# Altium PCB LVPowerModule.PcbDoc (part 1 of 2)
Units mm, origin at the board's own origin, x right, y up, seen from the top; angles counter-clockwise.
Board outline 100 x 60 mm, 2 copper layers (Top Layer, Bottom Layer); 81 components, 60 nets, 339 pads, 557 vias.
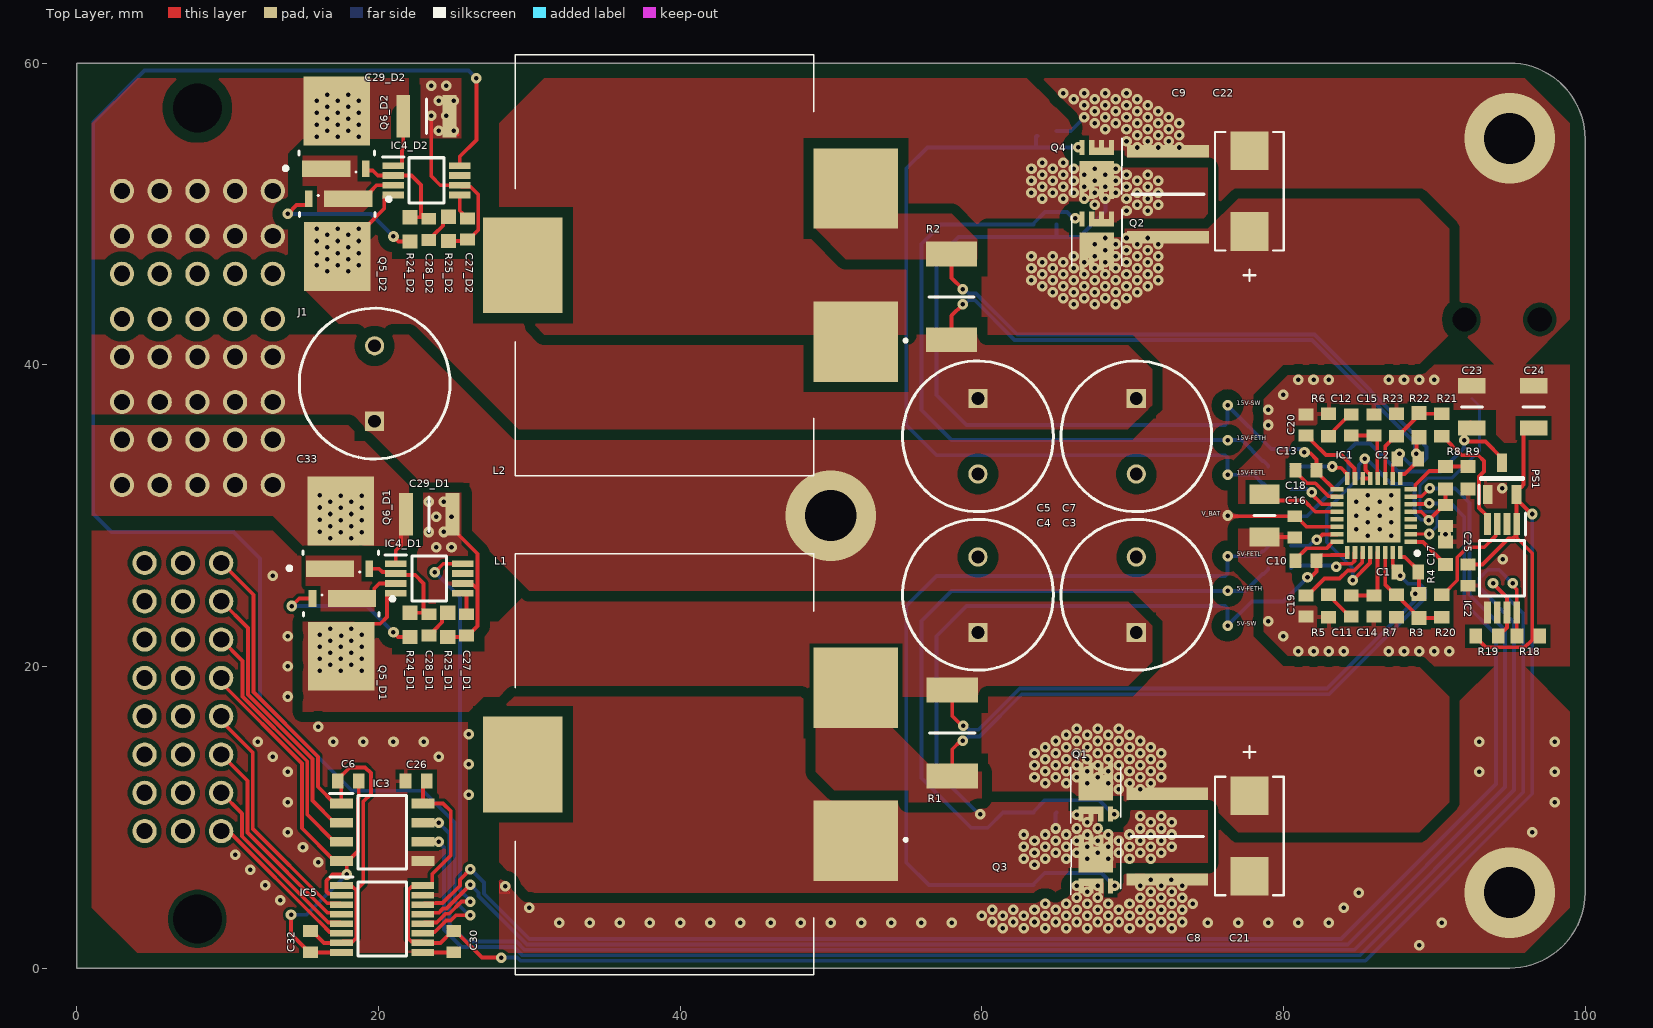
[diagram p0: Top Layer view]
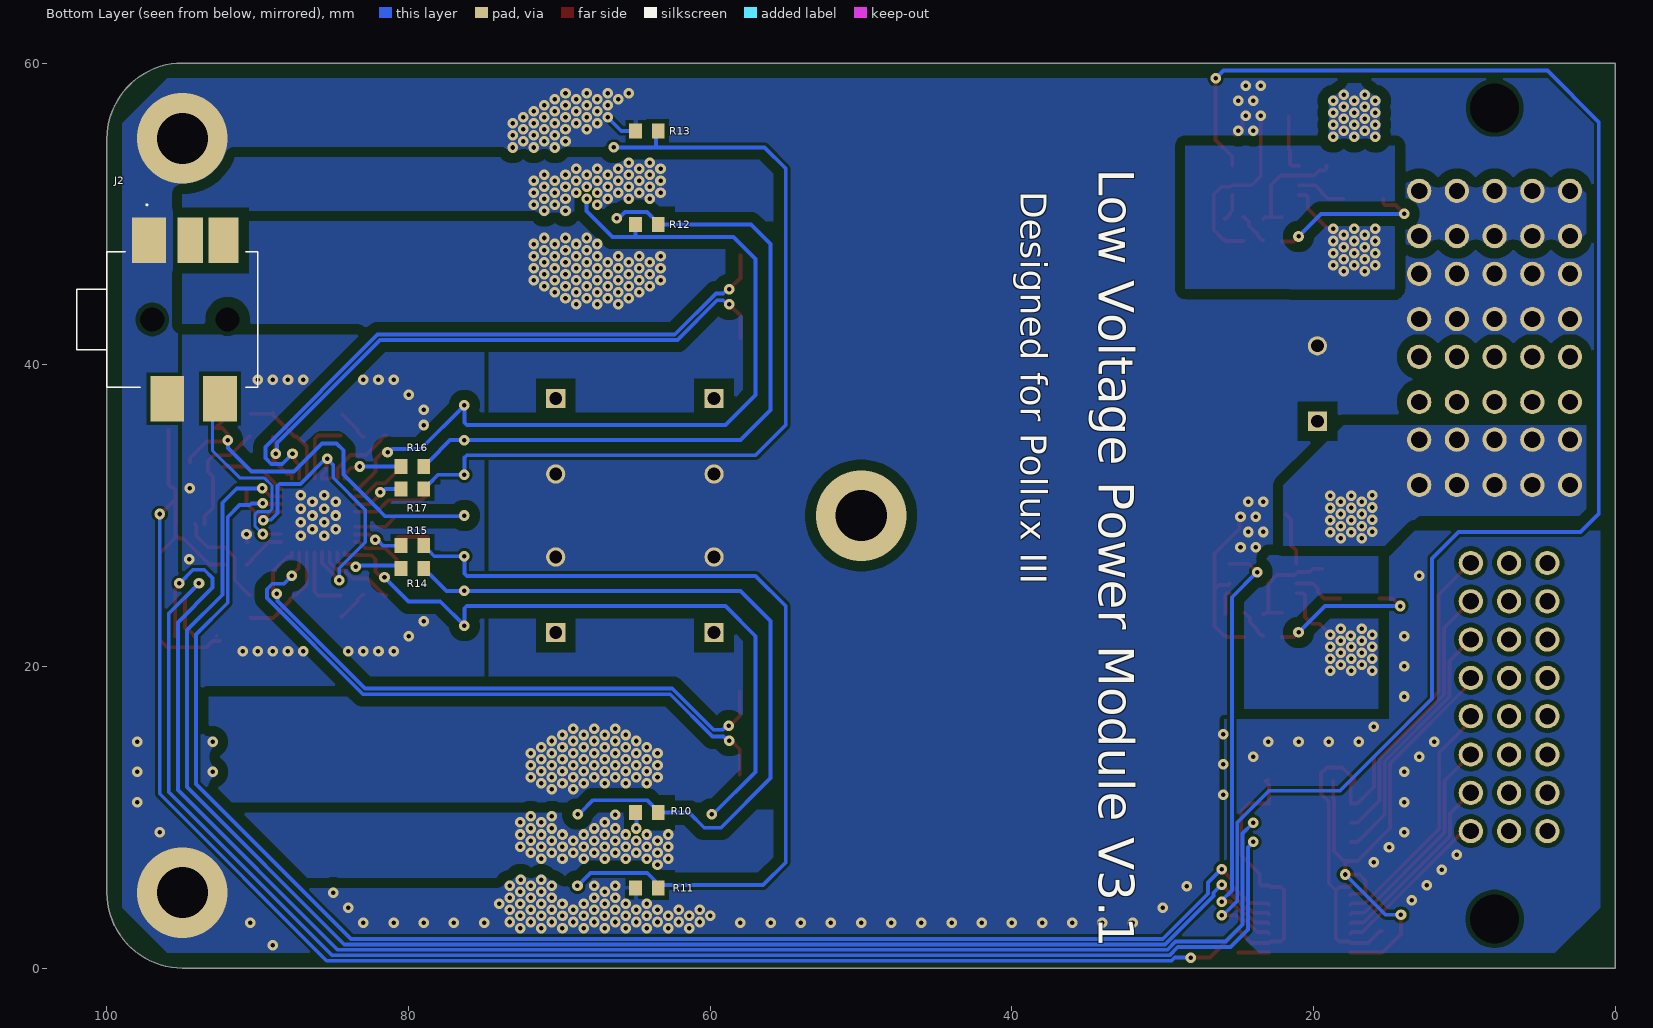
[diagram p1: Bottom Layer view, seen from below]
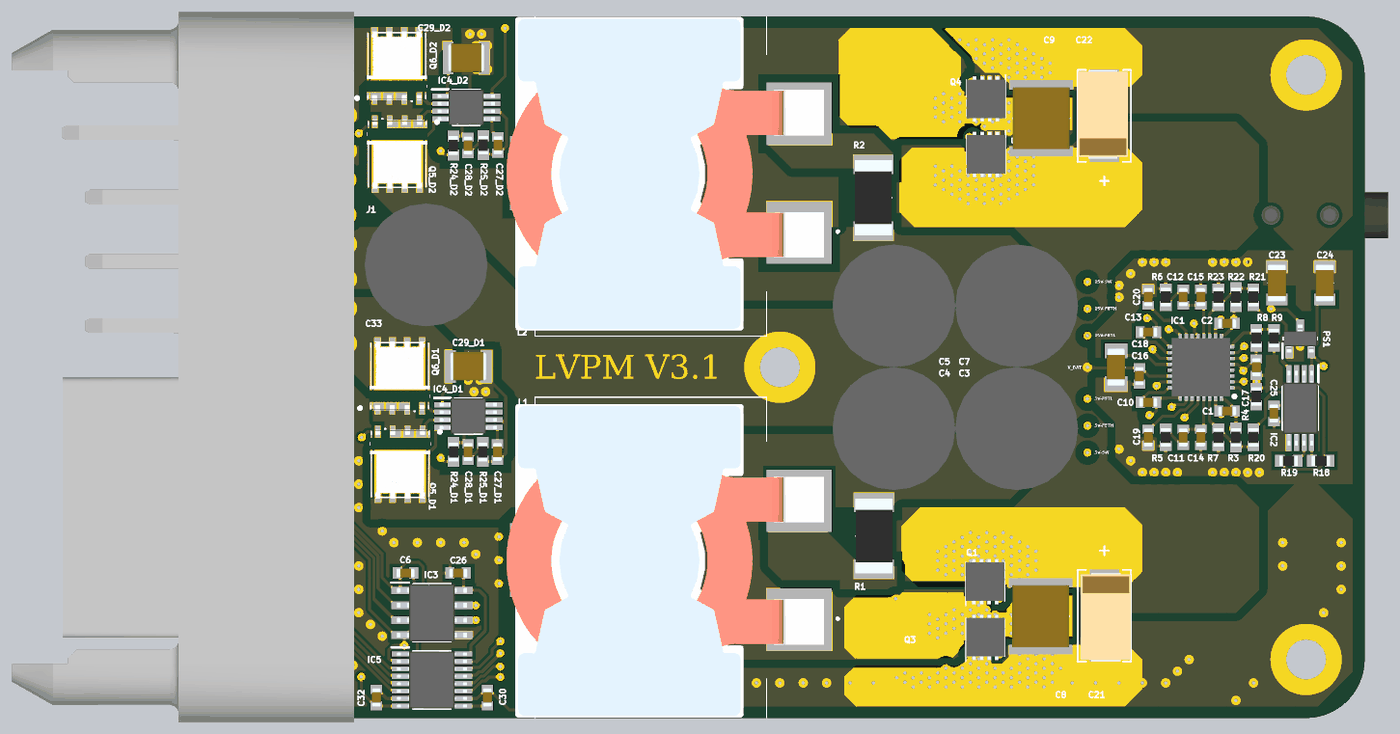
[diagram p3: 3D render of the assembled board from above, using the file's embedded part models]
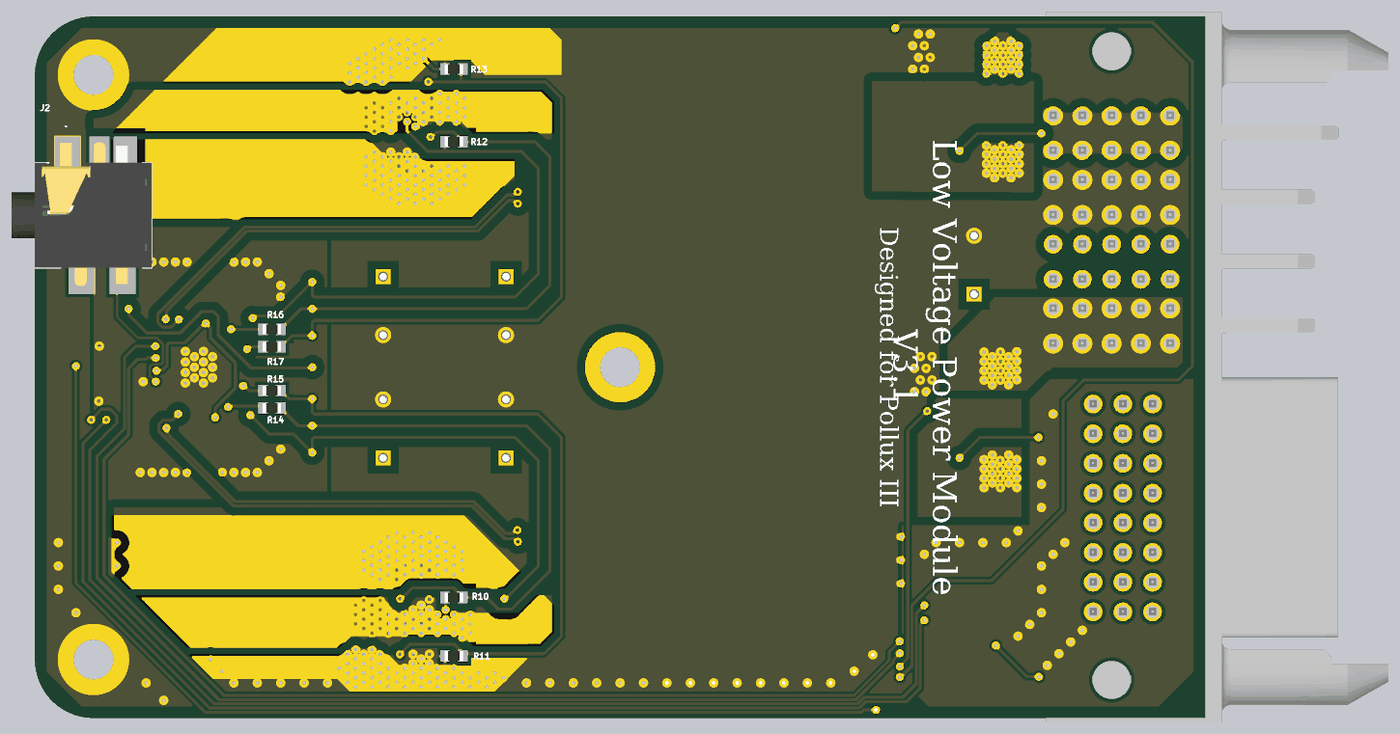
[diagram p4: 3D render of the assembled board from below, using the file's embedded part models]

## Layer stack, top to bottom
Top Solder: solder mask 0.0102, Solder Resist, Dk 3.5
Top Layer: signal copper 0.07
Dielectric 1: dielectric 0.32, FR-4, Dk 4.8
Bottom Layer: signal copper 0.07
Bottom Solder: solder mask 0.0102, Solder Resist, Dk 3.5

## Board outline
0,0 0,60 94.987,60 cw(c94.987,54.987) 100,54.987 100,5 cw(c95,5) 95,0

## Design rules (kind name [scope] priority, off if disabled: settings)
Clearance "High voltage Clearance 2" [InNetClass('HV2') vs Not InNetClass('HV1')] p1: gap=0.7 ignorepadtopadclearanceinfootprint=TRUE except(0.1: Arc-Text Track-Text SMDPad-Text THPad-Text Via-Text Fill-Text Poly-Text Region-Text Text-Text Text-Hole; 0.2: Arc-Arc Arc-Track Arc-SMDPad Track-Track Track-SMDPad; 0.3: Arc-THPad Arc-Via Arc-Hole Track-THPad Track-Via Track-Hole SMDPad-SMDPad SMDPad-THPad SMDPad-Via SMDPad-Hole THPad-Hole Via-Hole; 0.4: THPad-THPad THPad-Via Via-Via)
Clearance "High voltage Clearance 3" [InNetClass('HV3') vs Not InNetClass('HV4')] p2: gap=0.7 ignorepadtopadclearanceinfootprint=TRUE except(0.1: Arc-Text Track-Text SMDPad-Text THPad-Text Via-Text Fill-Text Poly-Text Region-Text Text-Text Text-Hole; 0.2: Arc-Arc Arc-Track Arc-SMDPad Track-Track Track-SMDPad; 0.3: Arc-THPad Arc-Via Arc-Hole Track-THPad Track-Via Track-Hole SMDPad-SMDPad SMDPad-THPad SMDPad-Via SMDPad-Hole THPad-Hole Via-Hole; 0.4: THPad-THPad THPad-Via Via-Via)
Clearance "High voltage Clearance 4" [InNetClass('HV4') vs Not InNetClass('HV3')] p3: gap=0.7 ignorepadtopadclearanceinfootprint=TRUE except(0.1: Arc-Text Track-Text SMDPad-Text THPad-Text Via-Text Fill-Text Poly-Text Region-Text Text-Text Text-Hole; 0.2: Arc-Arc Arc-Track Arc-SMDPad Track-Track Track-SMDPad; 0.3: Arc-THPad Arc-Via Arc-Hole Track-THPad Track-Via Track-Hole SMDPad-SMDPad SMDPad-THPad SMDPad-Via SMDPad-Hole THPad-Hole Via-Hole; 0.4: THPad-THPad THPad-Via Via-Via)
Clearance "High voltage Clearance 1" [InNetClass('HV1') vs Not InNetClass('HV2')] p4: gap=0.7 ignorepadtopadclearanceinfootprint=TRUE except(0.1: Arc-Text Track-Text SMDPad-Text THPad-Text Via-Text Fill-Text Poly-Text Region-Text Text-Text Text-Hole; 0.2: Arc-Arc Arc-Track Arc-SMDPad Track-Track Track-SMDPad; 0.3: Arc-THPad Arc-Via Arc-Hole Track-THPad Track-Via Track-Hole SMDPad-SMDPad SMDPad-THPad SMDPad-Via SMDPad-Hole THPad-Hole Via-Hole; 0.4: THPad-THPad THPad-Via Via-Via)
Clearance "General High voltage Clearance" [InNetClass('HV')] p5: gap=0.7 ignorepadtopadclearanceinfootprint=TRUE except(0.1: Arc-Text Track-Text SMDPad-Text THPad-Text Via-Text Fill-Text Poly-Text Region-Text Text-Text Text-Hole; 0.2: Arc-Arc Arc-Track Arc-SMDPad Track-Track Track-SMDPad; 0.3: Arc-THPad Arc-Via Arc-Hole Track-THPad Track-Via Track-Hole SMDPad-SMDPad SMDPad-THPad SMDPad-Via SMDPad-Hole THPad-Hole Via-Hole; 0.4: THPad-THPad THPad-Via Via-Via)
Clearance [All] p6: gap=0.102 ignorepadtopadclearanceinfootprint=TRUE except(0.2: Arc-Fill Arc-Poly Arc-Region Track-Fill Track-Poly Track-Region Via-Fill Via-Poly Via-Region; 0.3: SMDPad-Fill SMDPad-Poly SMDPad-Region THPad-Fill THPad-Poly THPad-Region Fill-Fill Fill-Poly Fill-Region Poly-Poly Poly-Region Region-Region)
ComponentClearance [All] p1 off: gap=0.254 collisioncheckmode=3 verticalgap=0.254 showdistances=FALSE
Height [All] p1 off: minheight=0 maxheight=25.4 prefheight=12.7
HoleSize [All] p1: absolutevalues=TRUE maxlimit=5 minlimit=0.2 maxpercent=80.000 minpercent=20.000
HoleToHoleClearance [All] p1: gap=0.4 allowstackedmicrovias=TRUE
MinimumSolderMaskSliver [All] p1: minsoldermaskwidth=0.05
NetAntennae [All] p1: netantennaetolerance=1
PlaneConnect [All] p1: planeconnectstyle=Direct reliefexpansion=0.508 reliefentries=4 reliefconductorwidth=0.254 reliefairgap=0.254
PolygonConnect [HasFootprint('*1608*')] p1: connectstyle=Relief reliefconductorwidth=0.254 reliefentries=4 polygonreliefangle="90 Angle" airgapwidth=0.254
PolygonConnect PolygonConnect_1 [All] p2: connectstyle=Direct reliefconductorwidth=0.254 reliefentries=4 polygonreliefangle="90 Angle" airgapwidth=0.254
RoomDefinition D2 [InComponentClass('D2')] p1 off: confinementstyle=ConfineIn formatcopy=TRUE lockcomponents=FALSE outline 101.1,12.1 110.1,12.1 110.1,21.4 101.1,21.4
RoomDefinition D1 [InComponentClass('D1')] p2 off: confinementstyle=ConfineIn formatcopy=TRUE lockcomponents=FALSE outline 101.1,1.5 109.6,1.5 109.6,10.8 101.1,10.8
RoomDefinition DAC [InComponentClass('DAC')] p3 off: confinementstyle=ConfineIn formatcopy=TRUE lockcomponents=FALSE outline 101.131,1.426 112.575,1.426 112.575,0.15 101.131,0.15
RoomDefinition Module [InComponentClass('Module')] p4 off: confinementstyle=ConfineIn formatcopy=TRUE lockcomponents=FALSE outline 59.25,-10.5 2,-10.5 2,-16.5 59.25,-16.5
RoomDefinition LVConverter [InComponentClass('LVConverter')] p5 off: confinementstyle=ConfineIn formatcopy=TRUE lockcomponents=FALSE outline -25.4,-27.9 25.4,-27.9 25.4,-2.5 -25.4,-2.5
RoutingVias [All] p1: holewidth=0.711 width=1.27 viastyle="Through Hole" minholewidth=0.2 minwidth=0.4 maxholewidth=0.711 maxwidth=1.27
SilkToSilkClearance [All] p1: silktosilkclearance=0.2
SilkToSolderMaskClearance [IsPad] p1: minsilkscreentomaskgap=0.1 clearancetoexposedcopper=TRUE
SolderMaskExpansion [All] p1: expansion=0.05 istentingtop=FALSE
Width [All] p1: maxlimit=2 minlimit=0.1 preferedwidth=0.254
21 further rules are at their usual default settings.

## Classes and differential pairs
net class HV: 5FETH 5SW 15FETH 15SW V_IN
net class HV1: 15V+
net class HV3: 5V+
channel class IdealDiode: D1 D2
component class D2: C27_D2 C28_D2 C29_D2 IC4_15V_Diode2 IC4_D2 Q5_D2 Q6_D2 R24_D2 R25_D2
component class D1: C27_D1 C28_D1 C29_D1 IC4_15V_Diode1 IC4_D1 Q5_D1 Q6_D1 R24_D1 R25_D1
component class DAC: C25 C26 C32 IC2 IC3 R18 R19
net class HV2: 5V_OUT 15V
net class HV4: 5V 15V_OUT
component class Module: C23 C24 C30 IC5 J1 PS1 R3 R7 R20 R21 R22 R23
component class LVConverter: C1 C2 C3 C4 C5 C7 C8 C9 C10 C11 C12 C13 C14 C15 C16 C17 C18 C19 C20 C21 C22 C33 IC1 J2 L1 L2 Q1 Q2 Q3 Q4 R1 R2 R4 R5 R6 R8 R9 R10 R11 R12 R13 R14 R15 R16 R17

## Components (designator, comment, footprint, x,y, rotation, side; value= is the part's Value field where it differs from the comment)
C1 "C0603C102J5RACTU" CAPC1608X95N 88.25,26.25 r0 top value=1n
C2 "C0603C102J5RACTU" CAPC1608X95N 88.25,33.75 r0 top value=1n
C3 "A750MW687M1VAAE018" CAPPRD500W65D1000H1800 70.25,22.25 r90 top value=680u
C4 "A750MW687M1VAAE018" CAPPRD500W65D1000H1800 59.75,22.25 r90 top value=680u
C5 "A750MW687M1VAAE018" CAPPRD500W65D1000H1800 59.75,37.75 r270 top value=680u
C6 "C0603C104K5RACTU" CAPC1608X95N 18,12.4 r0 top value=100n
C7 "A750MW687M1VAAE018" CAPPRD500W65D1000H1800 70.25,37.75 r270 top value=680u
C8 "C5750X7S2A106K230KB" CAPC5750X310N 72.295,8.709 r90 top value=10u
C9 "C5750X7S2A106K230KB" CAPC5750X310N 72.35,51.3 r270 top value=10u
C10 "C0603C104K5RACTU" CAPC1608X95N 81.5,27 r0 top value=100n
C11 "C0603C512J5GACAUTO" CAPC1608X87N 84.5,24 r90 top value=5.1n
C12 "C0603C362J5GACTU" CAPC1608X87N 84.5,36 r270 top value=3.6n
C13 "C0603C104K5RACTU" CAPC1608X95N 81.5,33 r0 top value=100n
C14 "C0603C121J5GACTU" CAPC1608X87N 86,24 r90 top value=120p
C15 "C0603C151J5GAC" CAPC1608X87N 86,36 r270 top value=150p
C16 "C0603C104K5RACTU" CAPC1608X95N 80.75,29.25 r90 top value=100n
C17 "C0603C104K5RACTU" CAPC1608X95N 90.75,30 r90 top value=100n
C18 "C1206X475M5RACAUTO" CAPC3316X195N 78.75,30 r90 top value=4.7uF
C19 "C0603C104K5RACTU" CAPC1608X95N 81.5,24 r270 top value=100n
C20 "C0603C104K5RACTU" CAPC1608X95N 81.5,36 r90 top value=100n
C21 "T598D336M035ATE065" CAPMP7.6X4.3_3.1N_KEM 77.75,8.75 r270 top value=33u
C22 "T598D336M035ATE065" CAPMP7.6X4.3_3.1N_KEM 77.75,51.5 r90 top value=33u
C23 "C1206C105K5RAC" CAPC3216X110N 92.5,37.2 r270 top value=1u
C24 "C1206C105K5RAC" CAPC3216X110N 96.6,37.2 r270 top value=1u
C25 "C0603C104K5RACTU" CAPC1608X95N 92.25,26.05 r90 top value=100n
C26 "C0603C104K5RACTU" CAPC1608X95N 22.5,12.4 r0 top value=100n
C27_D1 "C0603C104K5RACTU" CAPC1608X95N 25.85,22.75 r90 top value=100n (schematic designator C27)
C27_D2 "C0603C104K5RACTU" CAPC1608X95N 25.9,49 r90 top value=100n (schematic designator C27)
C28_D1 "C0603C103K5RACTU" CAPC1608X95N 23.35,22.75 r90 top value=10n (schematic designator C28)
C28_D2 "C0603C103K5RACTU" CAPC1608X95N 23.335,48.97 r90 top value=10n (schematic designator C28)
C29_D1 "C3225X7R2A106K250AC" CAPC3225X230N 23.365,30.075 r180 top value=10u (schematic designator C29)
C29_D2 "C3225X7R2A106K250AC" CAPC3225X230N 23.185,56.47 r180 top value=10u (schematic designator C29)
C30 "C0603C104K5RACTU" CAPC1608X95N 25,1.75 r270 top value=100n
C32 "C0603C104K5RACTU" CAPC1608X95N 15.5,1.75 r90 top value=100n
C33 "A750MW687M1VAAE018" CAPPRD500W65D1000H1800 19.75,36.25 r90 top value=680u
IC1 "LTC3892EUH#PBF" QFN50P500X500X80-33N-D 86,30 r180 top
IC2 "MCP47FEB02A0-E_ST" SOP65P640X120-8N 94.5,26.5 r270 top
IC3 "ADUM1251ARZ" SOIC127P600X175-8N 20.25,9 r0 top
IC4_D1 "LTC4372CMS8#TRPBF" SOP65P490X110-8N 23.365,25.825 r0 top (schematic designator IC4)
IC4_D2 "LTC4372CMS8#TRPBF" SOP65P490X110-8N 23.185,52.22 r0 top (schematic designator IC4)
IC5 "SI8640EB-B-IU" SOP64P600X175-16N 20.25,3.25 r0 top
J1 "46437-3001" 464373001 8,57.025 r270 top
J2 "980TR" 980TR 96.005,43 r180 bottom
L1 "PQ2614BHA-100K" PQ2614BLA1R0K 41,13.5 r90 top value=10u
L2 "PQ2614BHA-100K" PQ2614BLA1R0K 41,46.6 r90 top value=10u
PS1 "MCP1799T-3302H_TT" SOT95P237X112-3N 94.5,32.45 r90 top
Q1 "BSZ0703LS" BSZ011NE2LS5IATMA1 67.57,11.659 r270 top
Q2 "BSZ0703LS" BSZ011NE2LS5IATMA1 67.625,48.2 r90 top
Q3 "BSZ0703LS" BSZ011NE2LS5IATMA1 67.575,6.9 r270 top
Q4 "BSZ0703LS" BSZ011NE2LS5IATMA1 67.625,52.95 r90 top
Q5_D1 "BSC016N06NSATMA1" FP-PG-TDSON-8-MFG 17.535,21.725 r180 top (schematic designator Q5)
Q5_D2 "BSC016N06NSATMA1" FP-PG-TDSON-8-MFG 17.285,48.225 r180 top (schematic designator Q5)
Q6_D1 "BSC016N06NSATMA1" FP-PG-TDSON-8-MFG 17.5,29.25 r0 top (schematic designator Q6)
Q6_D2 "BSC016N06NSATMA1" FP-PG-TDSON-8-MFG 17.25,55.768 r0 top (schematic designator Q6)
R1 "CRF2512-FZ-R005ELF" RESC6432X80N 58.05,15.575 r90 top value=5m
R2 "CRF2512-FZ-R005ELF" RESC6432X80N 58,44.5 r270 top value=5m
R3 "CRCW0603100KJNEAC" RESC1608X55N 89,24 r90 top value=100k
R4 "CRCW060324K9FKTA" RESC1608X50N 90.75,27.5 r90 top value=24.9k
R5 "CRCW060322K1FKEB" RESC1608X50N 83,24 r90 top value=22.1k
R6 "CRCW060326K7FKEB" RESC1608X50N 83,36 r270 top value=26.7k
R7 "CRCW06035K60JNEAC" RESC1608X50N 87.5,24 r90 top value=5.6k
R8 "CRCW06030000ZSTB" RESC1608X50N 90.75,32.5 r270 top
R9 "CRCW06030000ZSTB" RESC1608X50N 92.25,32.5 r270 top
R10 "CRCW060322K1FKEB" RESC1608X50N 64.2,10.3 r180 bottom value=22.1k
R11 "CRCW060322K1FKEB" RESC1608X50N 64.2,5.3 r180 bottom value=22.1k
R12 "CRCW060322K1FKEB" RESC1608X50N 64.2,49.3 r180 bottom value=22.1k
R13 "CRCW060322K1FKEB" RESC1608X50N 64.2,55.5 r180 bottom value=22.1k
R14 "CRCW06030000ZSTB" RESC1608X50N 79.75,26.5 r180 bottom
R15 "CRCW06030000ZSTB" RESC1608X50N 79.75,28 r180 bottom
R16 "CRCW06030000ZSTB" RESC1608X50N 79.75,33.25 r180 bottom
R17 "CRCW06030000ZSTB" RESC1608X50N 79.75,31.75 r180 bottom
R18 "CRCW06035K60JNEAC" RESC1608X50N 96.25,22 r0 top value=5.6k
R19 "CRCW06035K60JNEAC" RESC1608X50N 93.5,22 r180 top value=5.6k
R20 "CRCW060322K1FKEB" RESC1608X50N 90.5,24 r90 top value=22.1k
R21 "CRCW060322K1FKEB" RESC1608X50N 90.5,36 r270 top value=22.1k
R22 "CRCW0603100KJNEAC" RESC1608X55N 89,36 r270 top value=100k
R23 "CRCW06035K60JNEAC" RESC1608X50N 87.5,36 r270 top value=5.6k
R24_D1 "CRCW060310R0JNEAC" RESC1608X55N 22.1,22.75 r270 top value=10 (schematic designator R24)
R24_D2 "CRCW060310R0JNEAC" RESC1608X55N 22.085,48.97 r270 top value=10 (schematic designator R24)
R25_D1 "CRCW06031K00FKECC" RESC1608X55N 24.6,22.75 r90 top value=1k (schematic designator R25)
R25_D2 "CRCW06031K00FKECC" RESC1608X55N 24.65,49 r90 top value=1k (schematic designator R25)

## Footprints (in the part's own frame and the unit in brackets; to place one, negate y for a bottom-side part, rotate by r counter-clockwise, add the part's x,y. Pads: shape width x height; smd on the part's side, far side on the other; paste and mask are expansions set on the pad)
980TR [mm]
  rect 2.24x3.02 smd: 1(-1.205,5.245) 4(-0.005,-5.245) 5(3.495,-5.245)
  rect 2.01x3.02 smd: 2(3.73,5.245)
  rect 1.7x3.02 smd: 3(1.515,5.245)
  round 0.8 hole 1.6 unplated: MH1(-0.995,0) MH2(4.005,0)
  silkscreen extent -6,-4.49 6,7.65, body extent -6,-6.06 6.01,6.23, height 4.31
464373001 [mm]
  round 1.625 hole 3.25 unplated: MH1(0,0) MH2(53.772,0)
  round 1.605 hole 1.07: P1(5.5,2.5) P1(5.5,5) P1(5.5,0) P1(5.5,-5) P1(5.5,-2.5) P1(8.5,5) P1(8.5,-2.5) P1(8.5,0) P1(8.5,2.5) P1(8.5,-5) P2(11,5) P2(11,-2.5) P2(11,0) P2(11,2.5) P2(11,-5) P2(14,-5) P2(14,-2.5) P2(14,0) P2(14,2.5) P2(14,5) P3(16.5,-5) P3(16.5,-2.5) P3(16.5,0) P3(16.5,2.5) P3(16.5,5) P3(19.5,-5) P3(19.5,-2.5) P3(19.5,0) P3(19.5,2.5) P3(19.5,5) P4(22,-5) P4(22,-2.5) P4(22,0) P4(22,2.5) P4(22,5) P4(25,-5) P4(25,-2.5) P4(25,0) P4(25,2.5) P4(25,5) S1(30.17,-3.5) S2(32.71,-3.5) S3(35.25,-3.5) S4(37.79,-3.5) S5(40.33,-3.5) S6(42.87,-3.5) S7(45.41,-3.5) S8(47.95,-3.5) S9(30.17,-0.96) S10(32.71,-0.96) S11(35.25,-0.96) S12(37.79,-0.96) S13(40.33,-0.96) S14(42.87,-0.96) S15(45.41,-0.96) S16(47.95,-0.96) S17(30.17,1.58) S18(32.71,1.58) S19(35.25,1.58) S20(37.79,1.58) S21(40.33,1.58) S22(42.87,1.58) S23(45.41,1.58) S24(47.95,1.58)
  body extent -3.35,-23.65 57.41,5.6, height 3.96
BSZ011NE2LS5IATMA1 [mm]
  rect 0.5x0.34 smd: 1(1.7,-0.975) 2(1.7,-0.325) 3(1.7,0.325)
  rect 1x0.34 smd: 4(1.45,0.975)
  rect 0.8x0.34 smd: 5(-1.55,0.975) 6(-1.55,0.325) 7(-1.55,-0.325) 8(-1.55,-0.975)
  rect 1.71x2.29 smd: 9(-0.295,0)
  rect 0.5x1.64 smd: 10(1.2,-0.325)
  silkscreen extent -1.65,-1.68 2.06,1.65, body extent -1.92,-1.65 1.92,1.65, height 1.2
CAPC1608X87N [mm]
  rect 0.78x0.98 smd: 1(-0.7,0) 2(0.7,0)
  body extent -0.8,-0.4 0.8,0.4, height 0.87
CAPC1608X95N [mm]
  rect 0.78x0.98 smd: 1(-0.7,0) 2(0.7,0)
  body extent -0.8,-0.4 0.8,0.4, height 0.95
CAPC3216X110N [mm]
  rect 1.02x1.82 smd: 1(-1.4,0) 2(1.4,0)
  silkscreen extent 0,-0.7 0,0.7, body extent -1.6,-0.8 1.6,0.8, height 1.1
CAPC3225X230N [mm]
  rect 0.92x2.82 smd: 1(-1.54,0) 2(1.54,0)
  silkscreen extent 0,-1.15 0,1.15, body extent -1.6,-1.25 1.6,1.25, height 2.3
CAPC3316X195N [mm]
  rect 1.28x1.96 smd: 1(-1.42,0) 2(1.42,0)
  silkscreen extent 0,-0.7 0,0.7, body extent -1.65,-0.8 1.65,0.8, height 1.95
CAPC5750X310N [mm]
  rect 0.81x5.41 smd: 1(-2.85,0) 2(2.85,0)
  silkscreen extent 0,-2.4 0,2.4, body extent -2.65,-2.45 2.65,2.45, height 3.07
CAPMP7.6X4.3_3.1N_KEM [mm]
  rect 2.56x2.5 smd paste+0 mask+0: 1(-2.672,0) 2(2.672,0)
  silkscreen extent -5.95,-2.28 3.93,2.28, body extent -3.67,-2.02 3.93,2.28, height 3.15
CAPPRD500W65D1000H1800 [mm]
  rect 1.275x1.275 hole 0.85: 1(0,0)
  round 1.275 hole 0.85: 2(5,0)
  silkscreen extent -2.5,-5 7.5,5, body extent -2.75,-5.25 7.75,5.25, height 28
FP-PG-TDSON-8-MFG [mm]
  rect 3.2x1.1 smd paste-1000 mask-1000: 1-2-3(-0.715,-2.775)
  rect 0.5x1.1 smd paste-1000 mask+0: 4(1.905,-2.775)
  rect 4.41x4.55 smd paste-1000 mask-1000: 5-6-7-8(0,1.05)
  silkscreen extent -3.53,-3 2.5,-1.6, body extent -2.68,-3.42 2.68,3.42, height 0.25
PQ2614BLA1R0K [mm]
  rect 5.33x5.59 smd: 1(-5.075,-10.655) 2(5.08,-10.655)
  rect 6.35x5.28 smd: MP1(0,11.42)
  silkscreen extent -13.95,-14.06 13.95,11.94, body extent -13.45,-12.79 13.35,14.39, height 15
QFN50P500X500X80-33N-D [mm]
  rect 0.85x0.3 smd mask+0.04: 1(-2.45,1.75) 8(-2.45,-1.75) 17(2.45,-1.75) 24(2.45,1.75)
  rect 0.85x0.3 smd: 2(-2.45,1.25) 3(-2.45,0.75) 4(-2.45,0.25) 5(-2.45,-0.25) 6(-2.45,-0.75) 7(-2.45,-1.25) 18(2.45,-1.25) 19(2.45,-0.75) 20(2.45,-0.25) 21(2.45,0.25) 22(2.45,0.75) 23(2.45,1.25)
  rect 0.3x0.85 smd mask+0.04: 9(-1.75,-2.45) 16(1.75,-2.45) 25(1.75,2.45) 32(-1.75,2.45)
  rect 0.3x0.85 smd: 10(-1.25,-2.45) 11(-0.75,-2.45) 12(-0.25,-2.45) 13(0.25,-2.45) 14(0.75,-2.45) 15(1.25,-2.45) 26(1.25,2.45) 27(0.75,2.45) 28(0.25,2.45) 29(-0.25,2.45) 30(-0.75,2.45) 31(-1.25,2.45)
  rect 3.55x3.55 smd: 33(0,0)
  silkscreen extent -3,2.38 -2.75,2.62, body extent -2.55,-2.55 2.55,2.55, height 0.8
RESC1608X50N [mm]
  rect 0.85x1 smd: 1(-0.75,0) 2(0.75,0)
  body extent -0.79,-0.43 0.79,0.43, height 0.5
RESC1608X55N [mm]
  rect 0.95x1 smd: 1(-0.8,0) 2(0.8,0)
  body extent -0.8,-0.4 0.8,0.4, height 0.55
RESC6432X80N [mm]
  rect 1.65x3.4 smd: 1(-2.85,0) 2(2.85,0)
  silkscreen extent 0,-1.5 0,1.5, body extent -3.2,-1.6 3.2,1.6, height 0.8
SOIC127P600X175-8N [mm]
  rect 1.525x0.65 smd: 1(-2.712,1.905) 2(-2.712,0.635) 3(-2.712,-0.635) 4(-2.712,-1.905) 5(2.712,-1.905) 6(2.712,-0.635) 7(2.712,0.635) 8(2.712,1.905)
  silkscreen extent -3.47,-2.45 1.6,2.58, body extent -3,-2.45 3,2.45, height 1.75
SOP64P600X175-16N [mm]
  rect 1.5x0.435 smd: 1(-2.7,2.222) 2(-2.7,1.588) 3(-2.7,0.952) 4(-2.7,0.318) 5(-2.7,-0.318) 6(-2.7,-0.952) 7(-2.7,-1.588) 8(-2.7,-2.222) 9(2.7,-2.222) 10(2.7,-1.588) 11(2.7,-0.952) 12(2.7,-0.318) 13(2.7,0.318) 14(2.7,0.952) 15(2.7,1.588) 16(2.7,2.222)
  silkscreen extent -3.45,-2.44 1.6,2.79, body extent -3,-2.44 3,2.44, height 1.75
SOP65P490X110-8N [mm]
  rect 1.425x0.45 smd: 1(-2.212,0.975) 2(-2.212,0.325) 3(-2.212,-0.325) 4(-2.212,-0.975) 5(2.212,-0.975) 6(2.212,-0.325) 7(2.212,0.325) 8(2.212,0.975)
  silkscreen extent -2.93,-1.5 1.15,1.55, body extent -2.45,-1.5 2.45,1.5, height 1.1
SOP65P640X120-8N [mm]
  rect 1.475x0.45 smd: 1(-2.938,0.975) 2(-2.938,0.325) 3(-2.938,-0.325) 4(-2.938,-0.975) 5(2.938,-0.975) 6(2.938,-0.325) 7(2.938,0.325) 8(2.938,0.975)
  silkscreen extent -3.67,-1.5 1.85,1.55, body extent -3.2,-1.5 3.2,1.5, height 1.2
SOT95P237X112-3N [mm]
  rect 1.25x0.65 smd: 1(-1.05,0.95) 2(-1.05,-0.95) 3(1.05,0)
  silkscreen extent -1.68,-1.43 0.08,1.53, body extent -1.18,-1.43 1.18,1.43, height 1.12

## Part data
C1 C2: library part C0603C104K5RACTU, "Capacitor", Manufacturer_Name=Kemet, Mouser Part Number=80-C0603C104K5R, Supplier Part Number 1=80-C0603C102J5R, Arrow Part Number=C0603C104K5RACTU, Arrow Price/Stock=https://www.arrow.com/en/products/c0603c104k5ractu/kemet-corporation, Datasheet Link=http://www.farnell.com/datasheets/2205446.pdf, Height=0.95mm, Manufacturer_Part_Number=C0603C104K5RACTU, Mouser Price/Stock=https://www.mouser.co.uk/ProductDetail/KEMET/C0603C104K5RACTU?qs=l5k%252BbMnNDkkVcnZPSAaaiQ%3D%3D, Supplier 1=Mouser
C3 C4 C5 C7 C33: "Capacitor Polarised", Manufacturer_Name=Kemet, Datasheet Link=https://www.kemet.com/specsheet/A750MW687M1VAAE018, Height=18mm, Manufacturer_Part_Number=A750MW687M1VAAE018
C6 C10 C13 C16 C17 C19 C20 C25 C26 C27_D1 C27_D2 C30 C32: "Capacitor", Manufacturer_Name=Kemet, Mouser Part Number=80-C0603C104K5R, Arrow Part Number=C0603C104K5RACTU, Arrow Price/Stock=https://www.arrow.com/en/products/c0603c104k5ractu/kemet-corporation, Datasheet Link=http://www.farnell.com/datasheets/2205446.pdf, Height=0.95mm, Manufacturer_Part_Number=C0603C104K5RACTU, Mouser Price/Stock=https://www.mouser.co.uk/ProductDetail/KEMET/C0603C104K5RACTU?qs=l5k%252BbMnNDkkVcnZPSAaaiQ%3D%3D, Supplier 1=Mouser, Supplier Part Number 1=80-C0603C104K5R
C8 C9: "Capacitor", Manufacturer_Name=TDK, Mouser Part Number=810-C5750X7S2A106KKB, Arrow Part Number=C5750X7S2A106K230KB, Arrow Price/Stock=https://www.arrow.com/en/products/c5750x7s2a106k230kb/tdk, Datasheet Link=http://www.mouser.com/ds/2/400/lcc_commercial_general_en-837201.pdf, Height=3.1mm, Manufacturer_Part_Number=C5750X7S2A106K230KB, Mouser Price/Stock=https://www.mouser.co.uk/ProductDetail/TDK/C5750X7S2A106K230KB?qs=XHchNesRtUZKzUEzha8N7w%3D%3D, Supplier 1=Mouser, Supplier Part Number 1=810-C5750X7S2A106KKB
C11: library part C0603C222J5RACAUTO, "Capacitor", Manufacturer_Name=Kemet, Mouser Part Number=80-C0603C222J5RAUTO, Supplier Part Number 1=80-C0603C512J5GAUTO, Arrow Part Number=C0603C222J5RACAUTO, Arrow Price/Stock=https://www.arrow.com/en/products/c0603c222j5racauto/kemet-corporation, Datasheet Link=https://api.kemet.com/component-edge/download/datasheet/C0603C222J5RACAUTO.pdf, Height=0.87mm, Manufacturer_Part_Number=C0603C222J5RACAUTO, Mouser Price/Stock=https://www.mouser.co.uk/ProductDetail/KEMET/C0603C222J5RACAUTO?qs=XYJIsZbdjSPu3wyG4zpZ%252Bg%3D%3D, Supplier 1=Mouser
C12: library part C0603C102J5RACTU, "Capacitor", Manufacturer_Name=Kemet, Mouser Part Number=80-C0603C102J5R, Supplier Part Number 1=80-C0603C362J5G, Arrow Part Number=C0603C102J5RACTU, Arrow Price/Stock=https://www.arrow.com/en/products/c0603c102j5ractu/kemet-corporation, Datasheet Link=https://api.kemet.com/component-edge/download/datasheet/C0603C102J5RACTU.pdf, Height=0.87mm, Manufacturer_Part_Number=C0603C102J5RACTU, Mouser Price/Stock=https://www.mouser.co.uk/ProductDetail/KEMET/C0603C102J5RACTU?qs=qG1y%252BaZBm0ORyW8zMfKotw%3D%3D, Supplier 1=Mouser
C14: library part C0603C101J5RACTU, "Capacitor", Manufacturer_Name=Kemet, Mouser Part Number=80-C0603C101J5R, Supplier Part Number 1=80-C0603C121J5G, Arrow Part Number=C0603C101J5RACTU, Arrow Price/Stock=https://www.arrow.com/en/products/c0603c101j5ractu/kemet-corporation, Datasheet Link=https://componentsearchengine.com/Datasheets/1/C0603C101J5RACTU.pdf, Height=0.87mm, Manufacturer_Part_Number=C0603C101J5RACTU, Mouser Price/Stock=https://www.mouser.com/Search/Refine.aspx?Keyword=80-C0603C101J5R, Supplier 1=Mouser
C15: library part C0603C101J5RACTU, "Capacitor", Manufacturer_Name=Kemet, Mouser Part Number=80-C0603C101J5R, Supplier Part Number 1=80-C0603C151J5G, Arrow Part Number=C0603C101J5RACTU, Arrow Price/Stock=https://www.arrow.com/en/products/c0603c101j5ractu/kemet-corporation, Datasheet Link=https://componentsearchengine.com/Datasheets/1/C0603C101J5RACTU.pdf, Height=0.87mm, Manufacturer_Part_Number=C0603C101J5RACTU, Mouser Price/Stock=https://www.mouser.com/Search/Refine.aspx?Keyword=80-C0603C101J5R, Supplier 1=Mouser
C18: "Capacitor", Manufacturer_Name=Kemet, Mouser Part Number=80-C1206X475M5RAUTO, Datasheet Link=https://www.kemet.com/specsheet/C1206X475M5RACAUTO, Height=1.95mm, Manufacturer_Part_Number=C1206X475M5RACAUTO, Mouser Price/Stock=https://www.mouser.co.uk/ProductDetail/KEMET/C1206X475M5RACAUTO?qs=%252B6g0mu59x7LXtOZABrHA3A%3D%3D, Supplier 1=Mouser, Supplier Part Number 1=80-C1206X475M5RAUTO
C21 C22: "No Description Available", Supplier Part Number 1=80-T598D336M35E65, Built_By=EMA_Frank, Copyright="Copyright (C) 2018 Accelerated Designs. All rights reserved", Manufacturer_Part_Number=T598D336M035ATE065, RefDes=RefDes, Source_Library=Kemet_2020-03-25_3.xlr, SourceLibrary=Kemet_2020-03-25_3, Supplier 1=Mouser, Type=DEV, Vendor=Kemet
C23 C24: "Capacitor", Manufacturer_Name=KEMET, Mouser Part Number=80-C1206C105K5RAC, Arrow Part Number=C1206C105K5RAC, Arrow Price/Stock=https://www.arrow.com/en/products/c1206c105k5rac/kemet-corporation, Datasheet Link=https://www.kemet.com/specsheet/C1206C105K5RACTU, Height=1.1mm, Manufacturer_Part_Number=C1206C105K5RAC, Mouser Price/Stock=https://www.mouser.co.uk/ProductDetail/KEMET/C1206C105K5RAC?qs=NTAB53G5bVDYFBtoIe7UwQ%3D%3D
C28_D1 C28_D2: library part C0603C104K5RACTU, "Capacitor", Manufacturer_Name=Kemet, Mouser Part Number=80-C0603C104K5R, Arrow Part Number=C0603C104K5RACTU, Arrow Price/Stock=https://www.arrow.com/en/products/c0603c104k5ractu/kemet-corporation, Datasheet Link=http://www.farnell.com/datasheets/2205446.pdf, Height=0.95mm, Manufacturer_Part_Number=C0603C104K5RACTU, Mouser Price/Stock=https://www.mouser.co.uk/ProductDetail/KEMET/C0603C104K5RACTU?qs=l5k%252BbMnNDkkVcnZPSAaaiQ%3D%3D, Supplier 1=Mouser, Supplier Part Number 1=80-C0603C104K5R
C29_D1 C29_D2: "Capacitor", Manufacturer_Name=TDK, Mouser Part Number=810-C3225X7R2A106K25, Datasheet Link=https://product.tdk.com/info/en/catalog/datasheets/mlcc_commercial_midvoltage_en.pdf, Height=2.3mm, Manufacturer_Part_Number=C3225X7R2A106K250AC, Mouser Price/Stock=https://www.mouser.co.uk/ProductDetail/TDK/C3225X7R2A106K250AC?qs=rSMjJ%252B1ewcQNu1nTZev8UA%3D%3D
IC1: "Integrated Circuit", Manufacturer_Name="Analog Devices", Supplier Part Number 1=584-LTC3892EUH-2#PBF, Arrow Part Number=LTC3892EUH#PBF, Arrow Price/Stock=https://www.arrow.com/en/products/ltc3892euhpbf/analog-devices, Datasheet Link=https://static6.arrow.com/aropdfconversion/d55dab638e5428544f7d993794f5b08548362f1a/25521248972647946369.pdf, Height=0.8mm, Manufacturer_Part_Number=LTC3892EUH#PBF, Supplier 1=Mouser
IC2: "Integrated Circuit", Arrow Part Number=MCP47FEB02A0-E/ST, Manufacturer_Name=Microchip, Mouser Part Number=579-MCP47FEB02A0EST, Arrow Price/Stock=https://www.arrow.com/en/products/mcp47feb02a0-est/microchip-technology?region=nac, Datasheet Link=http://www.microchip.com/mymicrochip/filehandler.aspx?ddocname=en573220, Height=1.2mm, Manufacturer_Part_Number=MCP47FEB02A0-E/ST, Mouser Price/Stock=https://www.mouser.co.uk/ProductDetail/Microchip-Technology/MCP47FEB02A0-E-ST?qs=rQCxX1QmdjKDJonwz1QvmA%3D%3D
IC3: "Integrated Circuit", Manufacturer_Name="Analog Devices", Mouser Part Number=584-ADUM1251ARZ, Arrow Part Number=ADUM1251ARZ, Arrow Price/Stock=https://www.arrow.com/en/products/adum1251arz/analog-devices?region=nac, Datasheet Link=https://datasheet.datasheetarchive.com/originals/distributors/Datasheets-DGA3/264898.pdf, Height=1.75mm, Manufacturer_Part_Number=ADUM1251ARZ, Mouser Price/Stock=https://www.mouser.co.uk/ProductDetail/Analog-Devices/ADUM1251ARZ?qs=WIvQP4zGani5W7Ldr0QsZA%3D%3D, Supplier 1=Mouser, Supplier Part Number 1=584-ADUM1251ARZ
IC4_D1 IC4_D2: "Integrated Circuit", Manufacturer_Name="Analog Devices", Mouser Part Number=584-LTC4372CMS8TRPBF, Arrow Part Number=LTC4372CMS8#TRPBF, Arrow Price/Stock=https://www.arrow.com/en/products/ltc4372cms8trpbf/analog-devices, Datasheet Link=https://www.arrow.com/en/products/ltc4372cms8trpbf/analog-devices, Height=1.1mm, Manufacturer_Part_Number=LTC4372CMS8#TRPBF, Mouser Price/Stock=https://www.mouser.co.uk/ProductDetail/Analog-Devices/LTC4372CMS8TRPBF?qs=T94vaHKWudSmRk6S7wUTVw%3D%3D, Supplier 1=Mouser, Supplier Part Number 1=584-LTC4372CMS8TRPBF
IC5: "Integrated Circuit", Manufacturer_Name=Skyworks, Mouser Part Number=634-SI8640EB-B-IU, Datasheet Link=https://www.mouser.in/datasheet/2/472/si864x_datasheet-2507790.pdf, Height=1.75mm, Manufacturer_Part_Number=SI8640EB-B-IU, Mouser Price/Stock=https://www.mouser.co.uk/ProductDetail/Skyworks-Solutions-Inc/SI8640EB-B-IU?qs=1mbolxNpo8djAX8%252BwHCeQQ%3D%3D
J1: "Connector", Manufacturer_Name=Molex, Mouser Part Number=538-46437-3001, Datasheet Link=https://componentsearchengine.com/Datasheets/1/46437-3007.pdf, Height=10mm, Manufacturer_Part_Number=46437-3001, Mouser Price/Stock=https://www.mouser.com/Search/Refine.aspx?Keyword=538-46437-3007, System=Connector
J2: "Connector", Manufacturer_Name="Keystone Electronics", Mouser Part Number=534-980, Datasheet Link=https://www.keyelco.com/product.cfm/product_id/2402, Height=4.14mm, Manufacturer_Part_Number=980TR, Mouser Price/Stock=https://www.mouser.co.uk/ProductDetail/Keystone-Electronics/980TR?qs=sOYabIlKNmdpbsH5J2zkLQ%3D%3D
L1 L2: "Inductor", Manufacturer_Name=Bourns, Mouser Part Number=652-PQ2614BHA-100K, Arrow Part Number=PQ2614BHA-100K, Arrow Price/Stock=https://www.arrow.com/en/products/pq2614bha-100k/bourns?region=nac, Datasheet Link=https://www.bourns.com/docs/Product-Datasheets/PQ2614.pdf, Height=16mm, Manufacturer_Part_Number=PQ2614BHA-100K, Mouser Price/Stock=https://www.mouser.co.uk/ProductDetail/Bourns/PQ2614BHA-100K?qs=1mbolxNpo8cus7p6tzCJzA%3D%3D, Supplier 1=Mouser, Supplier Part Number 1=652-PQ2614BHA-100K
PS1: "Power Supply", Arrow Part Number=MCP1799T-3302H/TT, Manufacturer_Name=Microchip, Mouser Part Number=579-CP1799T-3302H/TT, Arrow Price/Stock=https://www.arrow.com/en/products/mcp1799t-3302htt/microchip-technology?region=nac, Datasheet Link=https://ms.componentsearchengine.com/Datasheets/1/MCP1799T-3302H_TT.pdf, Height=1.12mm, Manufacturer_Part_Number=MCP1799T-3302H/TT, Mouser Price/Stock=https://www.mouser.co.uk/ProductDetail/Microchip-Technology-Atmel/MCP1799T-3302H-TT?qs=BJlw7L4Cy78EAGTR6Iuibw%3D%3D, Supplier 1=Mouser, Supplier Part Number 1=579-CP1799T-3302H/TT
Q1 Q2 Q3 Q4: library part BSZ011NE2LS5IATMA1, "MOSFET (N-Channel)", Manufacturer_Name=Infineon, Mouser Part Number=726-BSZ011NE2LS5IATM, Supplier Part Number 1=726-BSZ0703LSATMA1, Datasheet Link=https://componentsearchengine.com/Datasheets/1/BSZ011NE2LS5IATMA1.pdf, Height=1.1mm, Manufacturer_Part_Number=BSZ011NE2LS5IATMA1, Mouser Price/Stock=https://www.mouser.co.uk/ProductDetail/Infineon-Technologies/BSZ011NE2LS5IATMA1?qs=PzGy0jfpSMvXxmHh4MC9dw%3D%3D, Supplier 1=Mouser
Q5_D1 Q5_D2 Q6_D1 Q6_D2: library part CMP-32901-000166-1, "MOSFET N-CH 60V 30A TDSON-8", Continuous Drain Current=30A, Drain To Source Breakdown Voltage=60V, Drain To Source Resistance=1.4mΩ, Gate To Source Voltage=20V, Input Capacitace At Vds="5200pF @ 30V", Manufacturer=Infineon, Max Forward Diode Voltage=1.2V, Max Junction Temp=+150°C, Package=PG-TDSON-8, Power Dissipation=2.5W, Pulse Drain Current=400A, Temperature="-55°C to +150°C", Temperature Range Low=-55°C, Typ Forward Diode Voltage=0.9V, Automotive=No, Category=Trans, ComponentLink2Description=Datasheet, ComponentLink2URL=https://www.infineon.com/dgdl/Infineon-BSC016N06NS-DS-v02_01-en.pdf?fileId=db3a3043353fdc160135532b353c483c, Depletion Mode=False, Device Class L1="Discrete Semiconductors", Device Class L2=Transistors, Device Class L3=MOSFETs, Digikey Description="MOSFET N-CH 60V 30A TDSON-8", Drain To Source Voltage=60V, Footprint Url=https://www.infineon.com/cms/en/product/packages/PG-TDSON/PG-TDSON-8-17/, Gate Charge At Vgs="71nC @ 10V", Height=1.1mm, Lead Free=Yes, Manufacturer Part Number=BSC016N06NSATMA1, Number Of Channels=1, Number Of N Channels=1, Octopart=https://octopart.com/bsc016n06nsatma1-infineon-23421881, Reverse Recovery Charge=78nC, Reverse Recovery Time=61ns, RoHS=TRUE, Rthja Max=50K/W, Temperature Range High=+150°C, Threshold Vgs Max=3.3V, Threshold Vgs Min=2.1V, Transconductance=140S, Turn Off Delay Time=35ns, Turn On Delay Time=19ns
R1 R2: "Resistor", Manufacturer_Name=Bourns, Mouser Part Number=652-CRF2512FZR005ELF, Arrow Part Number=CRF2512-FZ-R005ELF, Arrow Price/Stock=https://www.arrow.com/en/products/crf2512-fz-r005elf/bourns, Datasheet Link=https://www.arrow.com/en/products/crf2512-fz-r005elf/bourns, Height=0.8mm, Manufacturer_Part_Number=CRF2512-FZ-R005ELF, Mouser Price/Stock=https://www.mouser.co.uk/ProductDetail/Bourns/CRF2512-FZ-R005ELF/?qs=iHX4uCgIbgMqZUuYK4Zqgg%3D%3D, Supplier 1=Mouser, Supplier Part Number 1=652-CRF2512FZR005ELF
R3 R22: library part CRCW0603100KFKEAC, "Resistor", Manufacturer_Name=Vishay, Mouser Part Number=71-CRCW0603100KFKEAC, Supplier Part Number 1=71-CRCW0603100KJNEAC, Arrow Part Number=CRCW0603100KFKEAC, Arrow Price/Stock=https://www.arrow.com/en/products/crcw0603100kfkeac/vishay, Datasheet Link=https://www.mouser.com/datasheet/2/427/crcwce3-1223726.pdf, Height=0.55mm, Manufacturer_Part_Number=CRCW0603100KFKEAC, Mouser Price/Stock=https://www.mouser.co.uk/ProductDetail/Vishay-Dale/CRCW0603100KFKEAC?qs=E3Y5ESvWgWPxzfNYyMgX1w%3D%3D, Supplier 1=Mouser
R4: library part CRCW060324K9FKEA, "Resistor", Manufacturer_Name=Vishay, Mouser Part Number=71-CRCW0603-24.9K-E3, Supplier Part Number 1=71-CRCW0603-24.9K, Arrow Part Number=CRCW060324K9FKEA, Arrow Price/Stock=https://www.arrow.com/en/products/crcw060324k9fkea/vishay, Datasheet Link=http://www.vishay.com/docs/20035/dcrcwe3.pdf, Height=0.5mm, Manufacturer_Part_Number=CRCW060324K9FKEA, Mouser Price/Stock=https://www.mouser.co.uk/ProductDetail/Vishay-Dale/CRCW060324K9FKEA?qs=duauLwvczSYlbxc75y0kVA%3D%3D, Supplier 1=Mouser
R5 R10 R11 R12 R13 R20 R21: library part CRCW06037K50FKEB, "Resistor", Manufacturer_Name=Vishay, Mouser Part Number=71-CRCW06037K50FKEB, Supplier Part Number 1=71-CRCW060322K1FKEB, Datasheet Link=http://www.vishay.com/docs/20035/dcrcwe3.pdf, Height=0.5mm, Manufacturer_Part_Number=CRCW06037K50FKEB, Mouser Price/Stock=https://www.mouser.co.uk/ProductDetail/Vishay-Dale/CRCW06037K50FKEB?qs=2ihuRUavkaTvW2vO4EimMQ%3D%3D, Supplier 1=Mouser
R6: library part CRCW060334K0FKEA, "Resistor", Manufacturer_Name=Vishay, Mouser Part Number=71-CRCW0603-34K-E3, Supplier Part Number 1=71-CRCW060326K7FKEB, Arrow Part Number=CRCW060334K0FKEA, Arrow Price/Stock=https://www.arrow.com/en/products/crcw060334k0fkea/vishay, Datasheet Link=http://www.vishay.com/docs/20035/dcrcwe3.pdf, Height=0.5mm, Manufacturer_Part_Number=CRCW060334K0FKEA, Mouser Price/Stock=https://www.mouser.com/Search/Refine.aspx?Keyword=71-CRCW0603-34K-E3, Supplier 1=Mouser
R7 R18 R19 R23: library part CRCW06035K62FKEB, "Resistor", Manufacturer_Name=Vishay, Mouser Part Number=71-CRCW06035K62FKEB, Supplier Part Number 1=71-CRCW06035K60JNEAC, Datasheet Link=http://www.vishay.com/docs/20035/dcrcwe3.pdf, Height=0.5mm, Manufacturer_Part_Number=CRCW06035K62FKEB, Mouser Price/Stock=https://www.mouser.co.uk/ProductDetail/Vishay-Dale/CRCW06035K62FKEB?qs=P6ImCWcZKGBvDktlVJxa7w%3D%3D, Supplier 1=Mouser
R8 R9 R14 R15 R16 R17: "Resistor", Manufacturer_Name=Vishay, Mouser Part Number=71-CRCW0603000ZT-RT5, Arrow Part Number=CRCW06030000ZSTB, Arrow Price/Stock=https://www.arrow.com/en/products/crcw06030000zstb/vishay?region=nac, Datasheet Link=http://www.vishay.com/docs/20035/dcrcwe3.pdf, Height=0.5mm, Manufacturer_Part_Number=CRCW06030000ZSTB, Mouser Price/Stock=https://www.mouser.co.uk/ProductDetail/Vishay-Dale/CRCW06030000ZSTB?qs=2ymmDbJkxOjBfbAlbZJVUA%3D%3D, Parameter 1=0, Supplier 1=Mouser, Supplier Part Number 1=71-CRCW0603000ZT-RT5
R24_D1 R24_D2 R25_D1 R25_D2: library part CRCW0603100RFKEBC, "Resistor", Manufacturer_Name=Vishay, Mouser Part Number=71-CRCW0603100RFKEBC, Arrow Part Number=CRCW0603100RFKEBC, Arrow Price/Stock=https://www.arrow.com/en/products/crcw0603100rfkebc/vishay?region=nac, Datasheet Link=https://www.vishay.com/docs/28773/crcwce3.pdf, Height=0.55mm, Manufacturer_Part_Number=CRCW0603100RFKEBC, Mouser Price/Stock=https://www.mouser.co.uk/ProductDetail/Vishay-Dale/CRCW0603100RFKEBC?qs=wd5RIQLrsJhdvQFtBw4oWg%3D%3D

## Via types
v1: diameter 0.7, hole 0.3, Top Layer to Bottom Layer, 554 vias
v2: diameter 6, hole 3.4, Top Layer to Bottom Layer, 3 vias

## Nets (pads, with @x,y where several pads share a name; then routed paths per layer and width w, separated by ;. In a path a pad name is that pad's centre, name@x,y a point inside that pad or via, vN(x,y) a via of type N, cw(c..) or ccw(c..) an arc to the next point about the centre after c; other vN are vias at no path point)
5FETH: Q1.4 R10.2 R14.2 | length 50.6
  Top Layer w0.254: Q1.4@68.545,10.152 Q1.4@68.545,10.157 ; Q1.4@68.545,10.209 Q1.4@68.545,10.157 ; v1(68.8,10.2) 68.588,10.2 Q1.4@68.545,10.157
  Bottom Layer w0.254: v1(68.8,10.2) 68.693,10.2 67.766,11.127 64.202,11.127 63.45,10.375 R10.2@63.45,10.3 61.4,10.3 60.4,9.3 59.3,9.3 56,12.6 56,23 58,25 v1(76.3,25) 77.5,25 78.627,26.127 78.702,26.127 79,26.425 R14.2@79,26.5
5FETL: Q3.4 R11.2 R15.2 | length 58.5
  Bottom Layer w0.254: R11.2@63.412,5.5 56.5,5.5 55,7 55,24 57,26 76.15,26 76.3,26.15 v1(76.3,27.3) 78.3,27.3 78.627,27.627 78.702,27.627 79,27.925 R15.2@79,28 ; R11.2@63.45,5.5 63.45,5.575 64.175,6.3 67.946,6.3 v1(68.805,5.441)
5SW: C10.2 IC1.25 L1.1 Q1.1 Q1.2 Q1.3 Q1.10 Q3.5 Q3.6 Q3.7 Q3.8 Q3.9 R10.1 | length 46
  Top Layer w0.254: v1(81.6,25.9) 81.685,25.985 81.908,25.985 82.2,26.278 82.2,27.1 82.463,27.363 83.164,27.363 83.178,27.377 84.227,27.377 84.25,27.4 IC1.25@84.25,27.55
  Bottom Layer w0.254: v1(59.9,10.2) 59.8,10.2 57,13 57,22 59,24 76.15,24 76.3,23.85 v1(76.3,22.7) 77.9,24.3 80,24.3 v1(81.6,25.9) ; v1(64.9,9.25) 64.9,10.25 R10.1@64.95,10.3
  other v1: 63.5,6.85 62.8,7.25 64.2,7.25 65.6,7.25 67,7.25 68.4,7.25 69.8,7.25 71.2,7.25 63.5,7.65 64.9,7.65 66.3,7.65 67.7,7.65 69.1,7.65 70.5,7.65 71.9,7.65 62.8,8.05 64.2,8.05 65.6,8.05 67,8.05 68.4,8.05 69.8,8.05 71.2,8.05 72.6,8.05 63.5,8.45 64.9,8.45 66.3,8.45 67.7,8.45 69.1,8.45 70.5,8.45 71.9,8.45 62.8,8.85 64.2,8.85 65.6,8.85 67,8.85 68.4,8.85 69.8,8.85 71.2,8.85 72.6,8.85 66.3,9.25 67.7,9.25 70.5,9.25 71.9,9.25 67,9.65 71.2,9.65 72.6,9.65 70.5,10.05 71.9,10.05 66.3,10.15
5V: C1.2 C3.1 C4.1 IC1.32 IC4_D1.4 Q5_D1.5-6-7-8 R1.2 R3.2 | length 46.4
  Top Layer w0.254: Q5_D1.5-6-7-8@17.535,20.675 17.535,20.745 19.613,22.823 20.123,22.823 20.568,23.267 20.568,24.752 20.666,24.85 IC4_D1.4@21.153,24.85 ; R1.2@58.05,18.325 58.05,16.7 58.677,16.073 v1(58.771,16.073) ; IC1.32@87.75,27.55 87.75,27.275 87.773,27.252 88.048,27.252 88.95,26.35 C1.2@88.95,26.25 89,26.2 R3.2@89,24.8
  Bottom Layer w0.254: v1(58.771,16.073) 58.892,16.073 59.164,15.801 59.801,15.801 62.525,18.525 82.897,18.525 88.702,24.33 88.702,24.744 v1(88.758,24.8)
  other v1: 16.1,19.7 17.5,19.7 18.9,19.7 16.8,20.1 18.2,20.1 16.1,20.5 17.5,20.5 18.9,20.5 16.8,20.9 18.2,20.9 16.1,21.3 17.5,21.3 18.9,21.3 16.8,21.7 18.2,21.7 17.535,22.025 16.1,22.1 18.9,22.1 16.8,22.5 18.2,22.5
5V+: C1.1 IC1.31 L1.2 R1.1 | length 41.3
  Top Layer w0.254: R1.1@58.05,12.825 58.05,14.5 58.624,15.074 v1(58.733,15.074) ; IC1.31@87.25,27.55 87.25,26.762 87.287,26.725 87.287,26.513 C1.1@87.55,26.25 C1.1@87.55,26.15
  Bottom Layer w0.254: v1(58.733,15.074) 58.841,15.074 59.114,15.347 59.851,15.347 62.653,18.15 83.025,18.15 89.4,24.525 89.4,25.115 89.038,25.477 88.273,25.477 v1(87.75,26)
5V_COMP: C11.2 C14.2 IC1.29 | length 4.5
  Top Layer w0.254: C11.2@84.5,24.7 C14.2@86,24.7 86.25,24.95 IC1.29@86.25,27.55
5V_CTRL: IC1.6 IC5.14 | length 101.5
  Top Layer w0.254: IC5.14@22.95,4.202 23.041,4.293 23.793,4.293 23.808,4.308 24.258,4.308 25.4,5.45 25.4,5.853 v1(26.104,6.557) ; IC1.6@88.45,30.75 88.473,30.773 89.646,30.773 v1(89.675,30.802)
  Bottom Layer w0.254: v1(26.104,6.557) 27,5.661 27,4.925 30,1.925 83.825,1.925 94.1,12.2 94.1,22.113 91.994,24.219 91.994,29.906 91.211,30.689 90.533,30.689 90.422,30.8 89.677,30.8 v1(89.675,30.802)
5V_FB: IC1.30 R3.1 R7.2 R20.1 | length 6.9
  Top Layer w0.254: IC1.30@86.75,27.55 86.75,25.425 87.425,24.75 R7.2@87.5,24.75 87.575,24.75 87.873,24.452 87.873,24.377 88.627,23.623 88.627,23.548 R3.1@88.975,23.2 ; R3.1@89,23.2 90.45,23.2 R20.1@90.5,23.25
5V_INJ: IC2.3 R20.2 | length 6.9
  Top Layer w0.254: R20.2@90.5,24.75 90.575,24.75 91.531,25.706 91.531,27.235 91.665,27.369 91.668,27.369 92.191,27.892 93.317,27.892 94.025,28.6 94.077,28.652 94.077,29.34 IC2.3@94.175,29.438
5V_OUT: C29_D1.2 IC4_D1.1 J1.P4 Q6_D1.5-6-7-8 | length 3.6
  Top Layer w0.254: IC4_D1.1@21.153,26.8 21.153,27.675 21.492,28.014 21.492,29.742 C29_D1.2@21.825,30.075
  other v1: 16.8,28.5 18.2,28.5 17.5,28.9 18.9,28.9 16.099,28.931 16.8,29.3 18.2,29.3 17.5,29.7 18.9,29.7 16.099,29.731 16.8,30.1 18.2,30.1 17.5,30.5 18.9,30.5 16.099,30.531 16.8,30.9 18.2,30.9 17.5,31.3 18.9,31.3 16.099,31.331
5V_SHDN: IC4_D1.8 IC5.12 | length 28.6
  Top Layer w0.254: IC5.12@22.95,2.932 23.041,3.023 23.865,3.023 24.331,3.488 24.334,3.488 24.442,3.596 24.696,3.596 25.5,4.4 v1(26.1,4.4) ; v1(23.75,26.25) 24.3,26.8 IC4_D1.8@25.577,26.8
  Bottom Layer w0.254: v1(23.75,26.25) 25.418,24.582 25.418,5.138 26.1,4.456 v1(26.1,4.4)
15FETH: Q2.4 R12.2 R16.2 | length 47
  Bottom Layer w0.254: v1(66.2,49.7) 66.079,49.7 65.652,50.127 64.202,50.127 63.45,49.375 R12.2@63.45,49.3 57.3,49.3 56,48 56,37 58,35 v1(76.3,35) 77.121,35 ; 77,35 77.25,35 78.627,33.623 78.702,33.623 79,33.325 R16.2@79,33.25